# Altium PCB HP48GX.PcbDoc
Units mm, origin at the board's own origin, x right, y up, seen from the top; angles counter-clockwise.
Board outline 31 x 31 mm, 2 copper layers (L1 Top Layer, L2 Bottom Layer), stack 0.35 mm thick; 26 components, 26 nets, 106 pads, 49 vias.
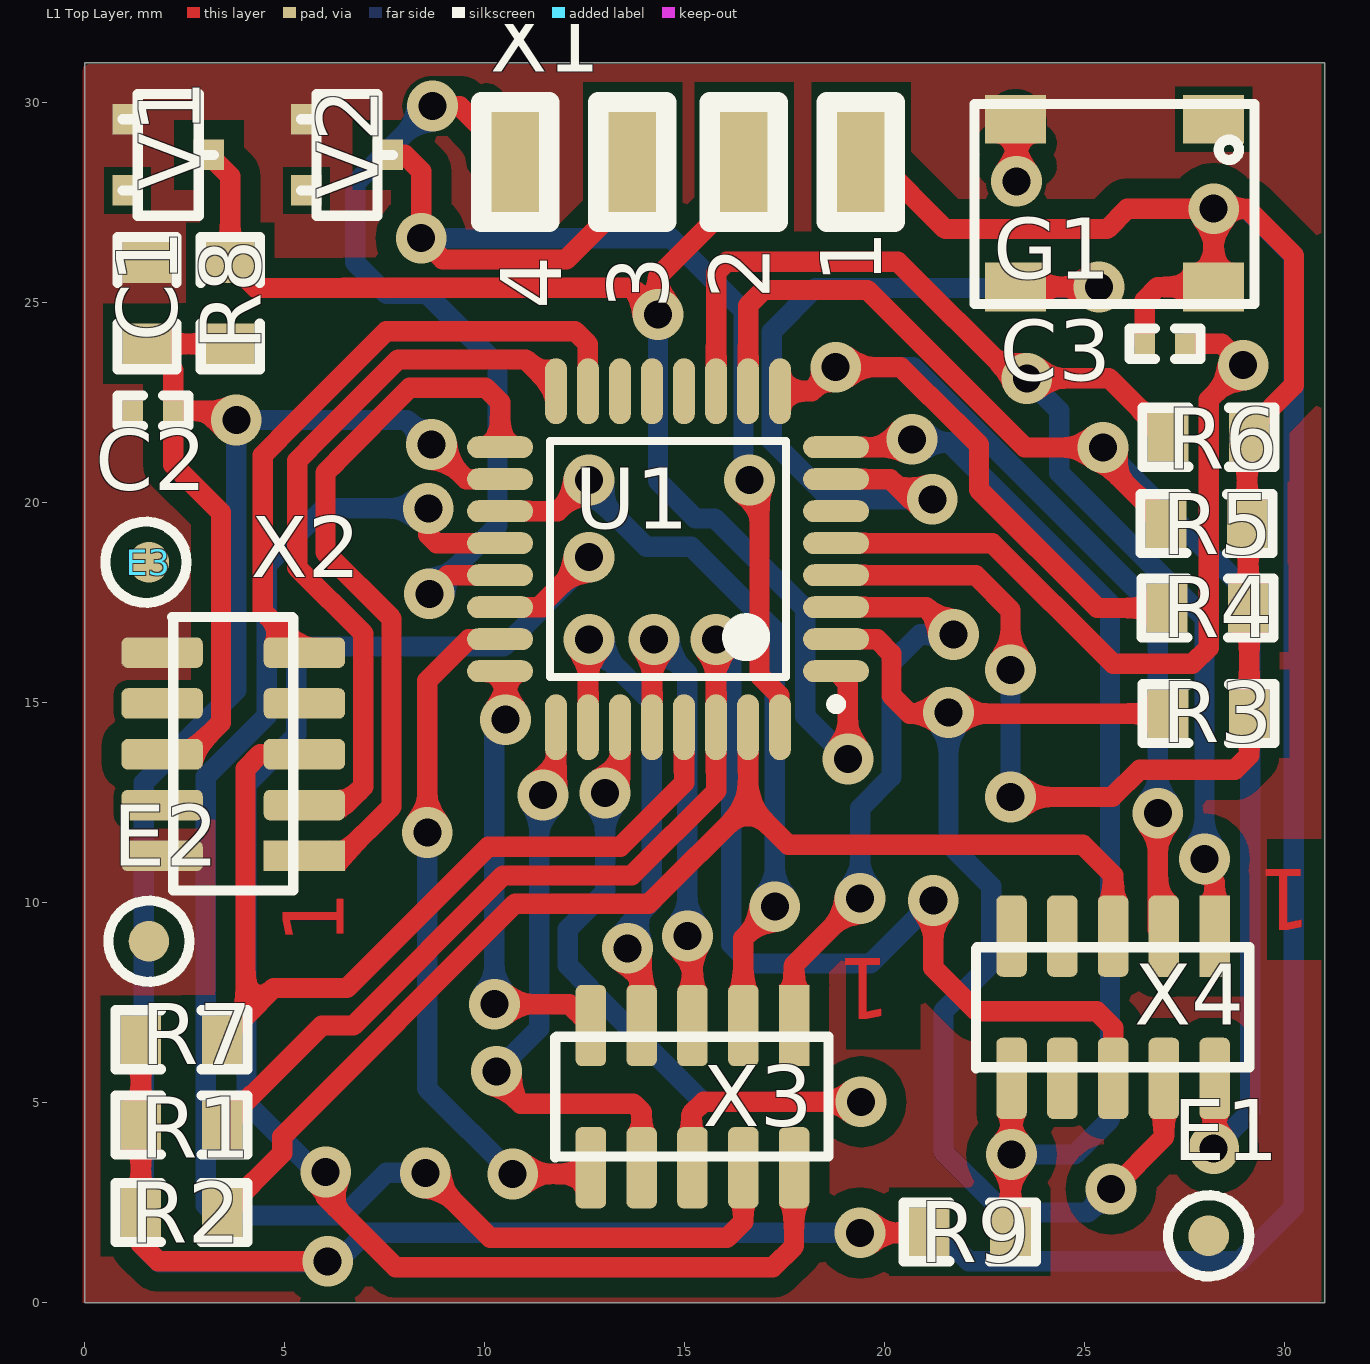
[diagram p0: L1 Top Layer view]
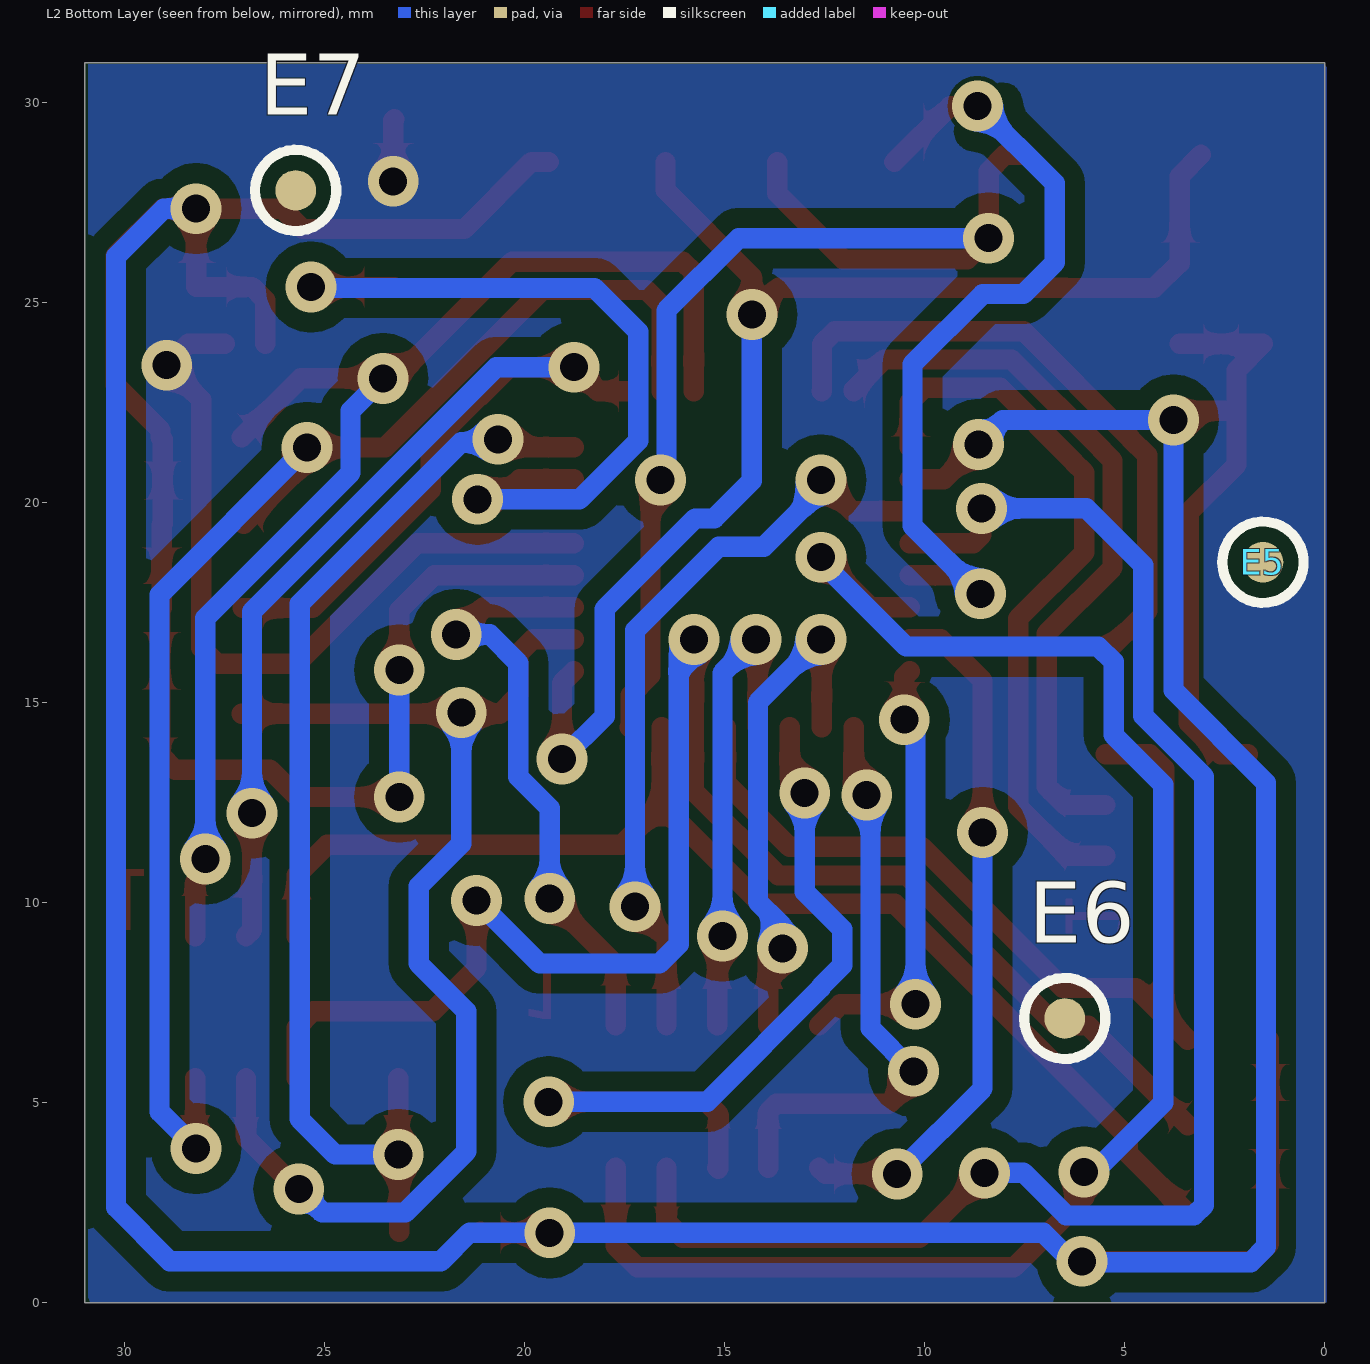
[diagram p1: L2 Bottom Layer view, seen from below]
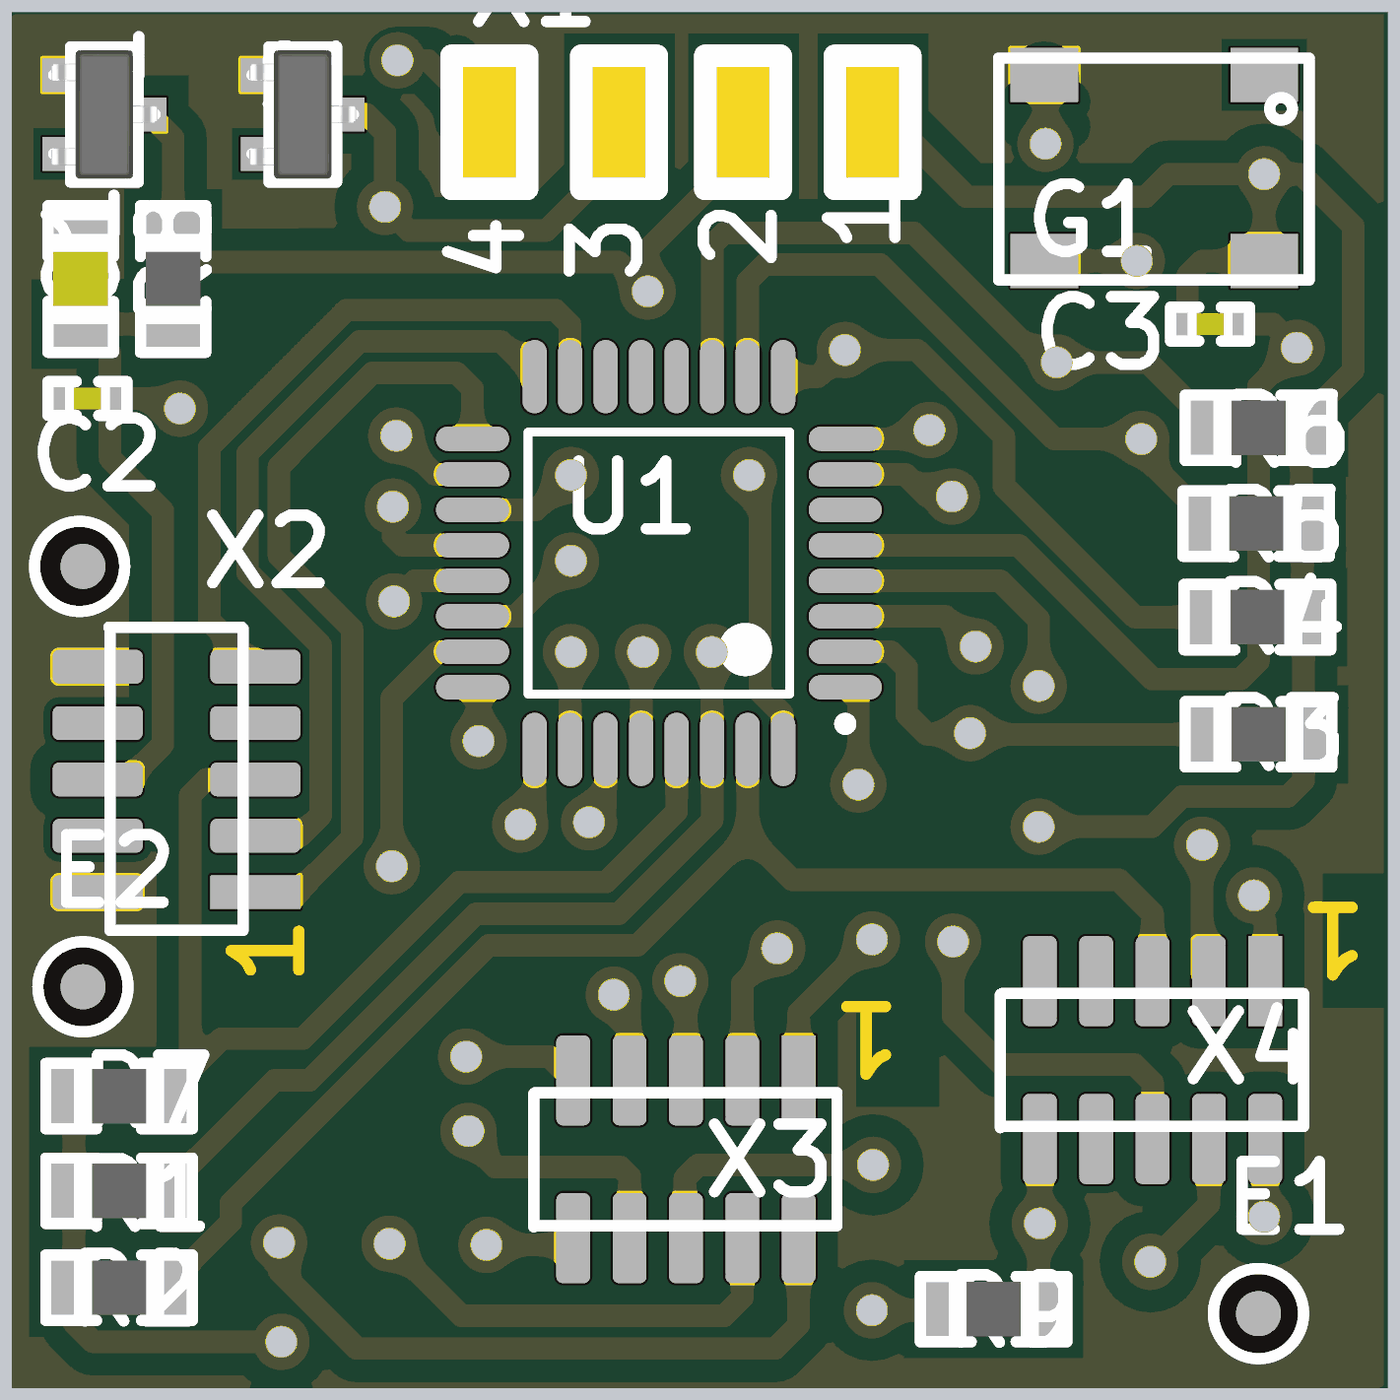
[diagram p2: 3D render of the assembled board from above, using the file's embedded part models]

## Layer stack, top to bottom
Top Solder: solder mask 0.02, Solder Resist, Dk 3.6
L1 Top Layer: signal copper 0.048
Prepreg: core 0.254, FR4, Tg150, Dk 4.2
L2 Bottom Layer: signal copper 0.048
Bottom Solder: solder mask 0.02, Solder Resist, Dk 3.6

## Board outline
0,0 0,31 31,31 31,0

## Design rules (kind name [scope] priority, off if disabled: settings)
AssemblyTestPointUsage [All] p1 off:
AssemblyTestpoint [All] p1: testpointundercomponent=TRUE minsize=1.016 maxsize=2.54 preferedsize=1.016 minholesize=0 maxholesize=5.08 preferedholesize=0 testpointgrid=0.025 usegrid=FALSE gridtolerance=0 allowsidebottom=TRUE minspacing=2.54
Clearance "Clearance_NPTH hole" [OnLayer('MultiLayer') and (PadIsPlated = 'False')] p1: gap=0.2
Clearance Clearance_NoNet [((Not InAnyNet) And IsPad)] p2: gap=0.2
Clearance "Clearance_Poly to Board Outline" [InPolygon vs OnLayer('KeepOutLayer')] p3: gap=0.508
Clearance "Clearance_Poly to DiffPair" [(InDifferentialPairClass('All Differential Pairs')) vs InPolygon] p4: gap=2.032
Clearance "Clearance_Poly to All" [InPolygon] p5: gap=0.5
Clearance [All] p6: gap=0.2
ComponentClearance [All] p1 off: gap=0.254 collisioncheckmode=3 verticalgap=0.254 showdistances=FALSE
DiffPairsRouting DiffPairsRouting_90R [InDifferentialPairClass('USB')] p1: maxlimit=0.203 minlimit=0.203 mostfreqgap=0.203 toplayer_minwidth=0.203 toplayer_maxwidth=0.406 toplayer_prefwidth=0.406 bottomlayer_minwidth=0.203 bottomlayer_maxwidth=0.406 bottomlayer_prefwidth=0.406 maxuncoupledlength=22.86
DiffPairsRouting DiffPairsRouting_100R [InDifferentialPairClass('Ethernet')] p2: maxlimit=0.254 minlimit=0.254 mostfreqgap=0.254 toplayer_minwidth=0.203 toplayer_maxwidth=0.356 toplayer_prefwidth=0.356 bottomlayer_minwidth=0.203 bottomlayer_maxwidth=0.356 bottomlayer_prefwidth=0.356 maxuncoupledlength=22.86
FabricationTestPointUsage TestPointUsage [All] p1 off: valid=0 allowmultiple=FALSE
FabricationTestpoint Testpoint [All] p1 off: side=3 testpointundercomponent=TRUE minsize=1.016 maxsize=2.54 preferedsize=1.524 minholesize=0.508 maxholesize=1.016 preferedholesize=0.813 testpointgrid=0.025 allowsidetop=TRUE allowsidebottom=TRUE usegrid=TRUE gridtolerance=0
HoleSize [All] p1: absolutevalues=TRUE maxlimit=4.724 minlimit=0.203 maxpercent=80.000 minpercent=20.000
HoleToHoleClearance [All] p1: gap=0.254 allowstackedmicrovias=FALSE
MatchedLengths "MatchedLengths PAN1.1 RX" [inDifferentialPair('PAN1.1_RX')] p1 off: tolerance=0.15 checknetsindiffpair=TRUE checkdiffpairvsdiffpair=FALSE checkxsignals=FALSE checkothers=FALSE
MatchedLengths "MatchedLengths PAN1.1 TX" [inDifferentialPair('PAN1.1_TX')] p2 off: tolerance=0.15 checknetsindiffpair=TRUE checkdiffpairvsdiffpair=FALSE checkxsignals=FALSE checkothers=FALSE
MatchedLengths "MatchedLengths PAN1.2 RX" [inDifferentialPair('PAN1.2_RX')] p3 off: tolerance=0.15 checknetsindiffpair=TRUE checkdiffpairvsdiffpair=FALSE checkxsignals=FALSE checkothers=FALSE
MatchedLengths "MatchedLengths PAN1.2 TX" [inDifferentialPair('PAN1.2_TX')] p4 off: tolerance=0.15 checknetsindiffpair=TRUE checkdiffpairvsdiffpair=FALSE checkxsignals=FALSE checkothers=FALSE
MatchedLengths "MatchedLengths LAN2 RX" [inDifferentialPair('LAN2_RX')] p5 off: tolerance=0.15 checknetsindiffpair=TRUE checkdiffpairvsdiffpair=FALSE checkxsignals=FALSE checkothers=FALSE
MatchedLengths "MatchedLengths LAN2 TX" [inDifferentialPair('LAN2_TX')] p6 off: tolerance=0.15 checknetsindiffpair=TRUE checkdiffpairvsdiffpair=FALSE checkxsignals=FALSE checkothers=FALSE
MatchedLengths "MatchedLengths USB" [inDifferentialPair('USB1_D')] p7 off: tolerance=0.15 checknetsindiffpair=TRUE checkdiffpairvsdiffpair=FALSE checkxsignals=FALSE checkothers=FALSE
MinimumAnnularRing [All] p1: minimumring=0.2
MinimumSolderMaskSliver [All] p1: minsoldermaskwidth=0.1
PlaneClearance [All] p1 off: clearance=0.406
PlaneConnect [All] p1 off: planeconnectstyle=Relief reliefexpansion=0.406 reliefentries=4 reliefconductorwidth=0.305 reliefairgap=0.508
PolygonConnect "PolygonConnect Direct" [All] p1: connectstyle=Direct reliefconductorwidth=0.254 reliefentries=4 polygonreliefangle="90 Angle" airgapwidth=0.254
RoutingCorners [All] p1 off: cornerstyle=45-Degree minsetback=2.54 maxsetback=2.54
RoutingLayers [All] p1 off: top layer_v5=TRUE bottom layer_v5=TRUE
RoutingPriority [All] p1 off: routingpriority=0
RoutingVias "Routing Vias" [All] p1: holewidth=0.254 width=0.61 viastyle="Through Hole" minholewidth=0.2 minwidth=0.457 maxholewidth=0.813 maxwidth=1.422
SilkToSolderMaskClearance SilkscreenOverComponentPads [IsPad] p1: minsilkscreentomaskgap=0.254 clearancetoexposedcopper=TRUE
SolderMaskExpansion "SolderMaskExpansion_NPTH Hole" [OnLayer('MultiLayer') and (PadIsPlated = 'False')] p1: expansion=0.102 soldermaskfromhole=TRUE
SolderMaskExpansion "SolderMaskExpansion Via 6/18" [((ObjectKind = 'Via') and (Holesize = (6)) and (ViaDiameter = (18)))] p2 off: expansion=-0.051
SolderMaskExpansion "SolderMaskExpansion Via 8/22" [((ObjectKind = 'Via') and (Holesize = (8)) and (ViaDiameter = (22)))] p3 off: expansion=-0.051
SolderMaskExpansion "SolderMaskExpansion Via 10/24" [((ObjectKind = 'Via') and (Holesize = (10)) and (ViaDiameter = (24)))] p4 off: expansion=-0.127
SolderMaskExpansion "SolderMaskExpansion Via 12/26" [((ObjectKind = 'Via') and (Holesize = (12)) and (ViaDiameter = (26)))] p5 off: expansion=-0.178
SolderMaskExpansion "SolderMaskExpansion Via 16/32" [((ObjectKind = 'Via') and (Holesize = (16)) and (ViaDiameter = (32)))] p6 off: expansion=-0.203
SolderMaskExpansion "SolderMaskExpansion Via 32/56" [((ObjectKind = 'Via') and (Holesize = (32)) and (ViaDiameter = (56)))] p7 off: expansion=-0.178
SolderMaskExpansion "SolderMaskExpansion Board" [All] p8: expansion=0.051
ViasUnderSMD [All] p1 off: allowed=FALSE
Width Width_90R [InDifferentialPairClass('USB')] p1: maxlimit=0.406 minlimit=0.406 preferedwidth=0.406
Width Width_100R [InDifferentialPairClass('Ethernet')] p2: maxlimit=0.356 minlimit=0.356 preferedwidth=0.356
Width "Width Track" [All] p3: maxlimit=0.508 minlimit=0.2 preferedwidth=0.305 minimp=50.000000 maximp=50.000000 favimp=50.000000
15 further rules are at their usual default settings.

## Classes and differential pairs
differential pair class USB: USB1_D
differential pair class Ethernet: L2_RX L2_TX LAN2_RX LAN2_TX P1.1_RX P1.1_TX PAN1.1_RX PAN1.1_TX PAN1.2_RX PAN1.2_TX

## Components (designator, comment, footprint, x,y, rotation, side; value= is the part's Value field where it differs from the comment)
C1 "1pF" 0805C 1.549,24.994 r90 top
C2 "100nF" 0402C 2.21,22.301 r180 top
C3 "100nF" 0402C 26.492,23.978 r0 top
E1 "Fiducial" "ZENTRIER Fiducial"#1 28.092,1.676 r0 top
E2 "Fiducial" "ZENTRIER Fiducial"#1 1.6,9.042 r0 top
E3 "Fiducial" "ZENTRIER Fiducial"#2 1.524,18.517 r0 top
E5 "Fiducial" "ZENTRIER Fiducial"#1 1.549,18.517 r180 bottom
E6 "Fiducial" "ZENTRIER Fiducial"#1 6.502,7.112 r180 bottom
E7 "Fiducial" "ZENTRIER Fiducial"#1 25.73,27.813 r180 bottom
G1 "CFPS-72 12MHz" TW0203A 29.235,29.972 r180 top
R1 "10K" 0805R 2.413,4.445 r180 top
R2 "10K" 0805R 2.413,2.261 r180 top
R3 "10K" 0805R 28.092,14.732 r0 top
R4 "10K" 0805R 28.067,17.374 r0 top
R5 "10K" 0805R 28.042,19.482 r0 top
R6 "10K" 0805R 28.092,21.641 r0 top
R7 "10K" 0805R 2.413,6.579 r180 top
R8 "2k" 0805R 3.632,24.994 r270 top
R9 "10k" 0805R 22.123,1.778 r180 top
U1 "ATtiny88" 32A_N 14.58,18.593 r180 top
V1 "MMBZ5227B 8B" SOT-23 2.083,28.702 r270 top
V2 "MMBZ5227B 8B" SOT-23 6.553,28.702 r270 top
X1 "LÖTANSCHLUSS 4-FACH" "LÖTANSCHLUSS 4X 2X5MM" 13.818,26.746 r90 top
X2 "Header 10P" "XHEAD2R10PR1.27MMSB SMD" 3.734,13.716 r90 top
X3 "Header 10P" "XHEAD2R10PR1.27MMSB SMD" 15.189,5.182 r180 top
X4 "Header 10P" "XHEAD2R10PR1.27MMSB SMD" 25.705,7.417 r180 top

## Footprints (in the part's own frame and the unit in brackets; to place one, negate y for a bottom-side part, rotate by r counter-clockwise, add the part's x,y. Pads: shape width x height; smd on the part's side, far side on the other; paste and mask are expansions set on the pad)
32A_N [mm] "Thin QFP, 32-Leads, Body 7x7mm, Pitch 0.8mm, IPC Medium Density"
  oval 1.65x0.55 smd: 1(-4.2,2.8) 2(-4.2,2) 3(-4.2,1.2) 4(-4.2,0.4) 5(-4.2,-0.4) 6(-4.2,-1.2) 7(-4.2,-2) 8(-4.2,-2.8) 17(4.2,-2.8) 18(4.2,-2) 19(4.2,-1.2) 20(4.2,-0.4) 21(4.2,0.4) 22(4.2,1.2) 23(4.2,2) 24(4.2,2.8)
  oval 0.55x1.65 smd: 9(-2.8,-4.2) 10(-2,-4.2) 11(-1.2,-4.2) 12(-0.4,-4.2) 13(0.4,-4.2) 14(1.2,-4.2) 15(2,-4.2) 16(2.8,-4.2) 25(2.8,4.2) 26(2,4.2) 27(1.2,4.2) 28(0.4,4.2) 29(-0.4,4.2) 30(-1.2,4.2) 31(-2,4.2) 32(-2.8,4.2)
  silkscreen extent -4.33,-2.95 2.95,3.75, body extent -3.5,-3.5 3.5,3.5, height 1.2
0402C [mil]
  rect 20x20 smd: 1(0,0) 2(40,0)
  silkscreen extent -15,-15 55,15, body extent 0,-10 40,10, height 22
0805C [mil]
  rect 40x48 smd: 1(-40,0) 2(40,0)
  silkscreen extent -65,-29 65,29, body extent -40,-25 40,25, height 50
0805R [mil]
  rect 40x48 smd: 1(-40,0) 2(40,0)
  silkscreen extent -65,-29 65,29, body extent -40,-25 40,25, height 20
"LÖTANSCHLUSS 4X 2X5MM" [mm]
  rect 3x1.5 smd paste-1.27: 1(1.778,-5.588) 2(1.778,-2.667) 3(1.778,0.127) 4(1.778,3.048)
  silkscreen extent 0.28,-6.43 3.28,3.91
SOT-23 [mil]
  rect 30x30 smd: 1(-35,-40) 2(35,-40) 3(0,40)
  silkscreen extent -60,-45 60,45, body extent -57,-47 57,47, height 39
TW0203A [mil]
  rect 60x48 smd: 1(40,15) 2(235,15) 3(235,180) 4(40,180)
  silkscreen extent 0,0 276,197
"XHEAD2R10PR1.27MMSB SMD" [mil]
  rect 30x80 smd: 1(-100,-69)
  rrect40% 30x80 smd: 2(-100,71) 3(-50,-69) 4(-50,71) 5(0,-69) 6(0,71) 7(50,-69) 8(50,71) 9(100,-69) 10(100,71)
  silkscreen extent -134,-58 135,61
"ZENTRIER Fiducial"#1 [mil]
  round 40 smd paste+0 mask+20: 1(0,0)
  L1 Top Layer pour cut-out: 0,40 15.31,36.96 28.28,28.28 36.96,15.31 40,0 40,0 36.96,-15.31 28.28,-28.28 15.31,-36.96 0,-40 0,-40 -15.31,-36.96 -28.28,-28.28 -36.96,-15.31 -40,0 -40,0 -36.96,15.31 -28.28,28.28 -15.31,36.96 0,40
  silkscreen extent -40,-40 40,40
"ZENTRIER Fiducial"#2 [mil]
  round 40 smd paste+0 mask+20: 1(2.99,0)
  L1 Top Layer pour cut-out: 0,40 15.31,36.96 28.28,28.28 36.96,15.31 40,0 40,0 36.96,-15.31 28.28,-28.28 15.31,-36.96 0,-40 0,-40 -15.31,-36.96 -28.28,-28.28 -36.96,-15.31 -40,0 -40,0 -36.96,15.31 -28.28,28.28 -15.31,36.96 0,40
  silkscreen extent -40,-40 40,40

## Part data
C1: library part "(1pF  0805  15.00064", "Kond/Chip-Kondensator"
C2 C3: library part "1uF  0402  118194", "Kond/Chip-Kondensator"
E1 E2 E3 E5 E6 E7: library part "ZENTRIERMARKE Fiducial", "Zubehör/Zentriermarke, 2...8x diagonal auf jedem Print"
G1: library part "OSZI: 8MHz TW0203  TW0203A  117861", "RF/OSZI"
R1 R2 R3 R4 R5 R6 R7 R8 R9: library part "(1K  0805  14.00130", "Wid/Chip-Widerstand"
U1: library part ATtiny88-AU, "8-bit AVR Microcontroller, 1.8-5.5V, 8KB Flash, 64 Bytes EEPROM, 512 Bytes SRAM, 32-pin TQFP, Industrial Grade (-40°C to 85°C), Pb-Free"
V1 V2: library part "MMBZ5227B 8B  SOT-23  10.00022", "Semidisc/Zener-Diode"
X1: library part "LÖTANSCHLUSS 4-FACH  LÖTANSCHLUSS 4X 2X5MM  -", "Stecker/Lötanschluss"
X2 X3 X4: library part "HEADER10P  XHEAD2R20PR0.5SB  119896", "Stecker/Headerf Stehend"

## Via types
v1: diameter 1.27, hole 0.7, L1 Top Layer to L2 Bottom Layer, tented bottom, 49 vias

## Nets (pads, with @x,y where several pads share a name; then routed paths per layer and width w, separated by ;. In a path a pad name is that pad's centre, name@x,y a point inside that pad or via, vN(x,y) a via of type N, cw(c..) or ccw(c..) an arc to the next point about the centre after c; other vN are vias at no path point)
+5V: C1.1 C2.1 C3.1 G1.4 R1.2 R2.2 R3.2 R4.2 R5.2 R6.2 R7.2 R8.2 R9.2 U1.4 U1.18 X1.1 X2.6 | length 158.6
  L1 Top Layer w0.508: R7.2 R1.2 R2.2 1.397,1.473 1.829,1.041 v1(6.071,1.041) ; X2.6 2.61,13.716 3.4,14.506 3.4,19.764 2.21,20.955 C2.1 ; R8.2 C1.1 2.21,23.317 C2.1 ; v1(3.785,22.073) 3.556,22.301 C2.1 ; v1(8.661,21.463) 9.532,20.593 U1.18 U1.18@10.359,20.572 ; U1.4 22.269,18.193 23.139,17.323 v1(23.139,15.824) ; v1(19.38,1.753) 21.082,1.753 R9.2 ; X1.1 19.837,28.524 21.514,26.848 25.552,26.848 26.06,27.356 v1(28.219,27.356) ; v1(23.139,12.649) 25.689,12.649 26.371,13.332 28.75,13.332 29.108,13.691 R3.2 29.108,17.348 R4.2 29.083,19.456 R5.2 29.058,21.59 R6.2 29.108,21.819 30.226,22.936 30.226,26.187 29.058,27.356 v1(28.219,27.356) ; C3.1 26.492,25.07 26.822,25.4 G1.4 v1(28.219,27.356)
  L2 Bottom Layer w0.508: v1@6.071,1.016 1.855,1.016 1.473,1.398 1.473,13.005 3.785,15.316 v1(3.785,22.073) 8.052,22.073 v1(8.661,21.463) ; v1(6.071,1.041) 6.326,1.041 7.037,1.753 v1(19.38,1.753) 21.387,1.753 22.098,1.041 28.877,1.041 30.223,2.388 30.223,26.165 29.032,27.356 v1(28.219,27.356) ; v1(23.139,12.649) v1(23.139,15.824)
A0: R6.1 U1.11 X4.1 | length 32.1
  L1 Top Layer w0.508: U1.11 15.78,25.762 16.049,26.031 20.324,26.031 23.241,23.114 v1(23.546,23.114) 25.603,23.114 R6.1 ; v1(27.991,11.1) 27.991,10.77 28.245,10.516 X4.1
  L2 Bottom Layer w0.508: v1(23.546,23.114) 24.359,22.301 24.359,20.752 27.991,17.12 v1(27.991,11.1)
A1: R5.1 U1.10 X4.2 | length 36.6
  L1 Top Layer w0.508: U1.10 16.58,24.936 16.967,25.323 19.558,25.323 23.495,21.387 v1(25.451,21.387) 25.451,21.057 R5.1 ; v1(28.219,3.861) 28.245,3.886 X4.2
  L2 Bottom Layer w0.508: v1(25.451,21.387) 29.134,17.704 29.134,4.775 v1(28.219,3.861)
A2: R4.1 U1.9 X4.3 | length 31.8
  L1 Top Layer w0.508: U1.9 18.17,22.793 v1(18.771,23.393) 20.393,23.393 21.107,22.679 21.127,22.679 22.352,21.454 22.352,20.331 25.309,17.374 R4.1 ; v1(26.822,12.243) 26.822,9.322 X4.3
  L2 Bottom Layer w0.508: v1(18.771,23.393) 20.716,23.393 26.822,17.287 v1(26.822,12.243)
A3: R3.1 U1.2 X4.4 | length 30
  L1 Top Layer w0.508: U1.2 19.805,16.593 20.164,16.235 20.164,15.189 20.621,14.732 R3.1 ; v1(25.654,2.845) 25.679,2.845 26.975,4.14 X4.4
  L2 Bottom Layer w0.508: v1(21.59,14.757) 21.59,11.481 22.657,10.414 22.657,8.484 21.463,7.29 21.463,3.785 22.987,2.261 25.07,2.261 v1(25.654,2.845)
A4: R2.1 U1.31 X4.5 | length 30.9
  L1 Top Layer w0.508: R2.1@3.454,2.261 4.931,3.737 4.931,4.158 10.752,9.979 14.1,9.979 16.58,12.458 ; U1.31 16.58,12.458 ; X4.5 25.705,10.693 24.943,11.455 17.583,11.455 16.58,12.458
A5: R1.1 U1.30 X4.6 | length 41.3
  L1 Top Layer w0.508: R1.1 5.918,6.934 6.706,6.934 10.458,10.687 13.669,10.687 15.78,12.797 U1.30 ; U1.30@15.773,14.399 v1(15.773,16.586) ; v1(21.209,10.06) 21.209,8.382 22.301,7.29 25.298,7.29 25.705,6.883 X4.6
  L2 Bottom Layer w0.508: v1(15.773,16.586) 16.158,16.202 16.158,8.963 16.637,8.484 19.632,8.484 v1(21.209,10.06)
A9: U1.22 X3.2 | length 40.7
  L1 Top Layer w0.508: v1(6.02,3.277) 6.02,2.642 7.772,0.889 17.196,0.889 17.729,1.422 X3.2 ; U1.22 11.449,17.393 11.449,17.494 v1(12.598,18.644)
  L2 Bottom Layer w0.508: v1(6.02,3.277) 5.766,3.277 4.039,5.004 4.039,12.954 5.281,14.197 5.281,16.026 5.664,16.408 10.465,16.408 12.598,18.542 v1(12.598,18.644)
A10: U1.19 X3.3 | length 19.1
  L1 Top Layer w0.508: U1.19 11.817,19.793 v1(12.598,20.574) ; X3.3 16.459,9.119 v1(17.247,9.906)
  L2 Bottom Layer w0.508: v1(12.598,20.574) 12.598,20.333 14.027,18.904 15.157,18.904 17.247,16.815 v1(17.247,9.906)
A11: U1.20 X3.4 | length 40
  L1 Top Layer w0.508: v1(8.509,3.251) 10.135,1.626 16.053,1.626 16.459,2.032 X3.4 ; v1(8.585,19.863) 8.585,19.202 8.795,18.993 U1.20
  L2 Bottom Layer w0.508: v1(8.509,3.251) 7.534,3.251 6.471,2.188 3.273,2.188 3.023,2.438 3.023,13.157 4.545,14.68 4.545,18.439 5.969,19.863 v1(8.585,19.863)
A12: U1.28 X3.5 | length 12.3
  L1 Top Layer w0.508: U1.28 14.18,16.542 v1(14.224,16.586) ; v1(15.062,9.169) 15.189,9.042 X3.5
  L2 Bottom Layer w0.508: v1(14.224,16.586) 15.062,15.748 v1(15.062,9.169)
A13: U1.27 X3.6 | length 21
  L1 Top Layer w0.508: v1(13.005,12.751) 13.38,13.126 U1.27 ; X3.6 15.164,3.353 15.164,4.724 15.469,5.029 v1(19.406,5.029)
  L2 Bottom Layer w0.508: v1(13.005,12.751) 13.005,10.278 12.068,9.341 12.068,8.439 12.598,7.909 12.598,7.874 15.392,5.08 ; 15.443,5.029 v1(19.406,5.029)
A14: U1.26 X3.7 | length 12.9
  L1 Top Layer w0.508: U1.26 12.58,16.567 v1(12.598,16.586) ; v1(13.564,8.865) 13.919,8.509 X3.7
  L2 Bottom Layer w0.508: v1(12.598,16.586) 14.173,15.011 14.173,10.033 13.564,9.423 v1(13.564,8.865)
A15: U1.25 X3.8 | length 14.8
  L1 Top Layer w0.508: v1(10.287,5.791) 10.287,5.588 10.897,4.978 13.716,4.978 13.919,4.775 X3.8 ; v1(11.455,12.7) 11.78,13.024 U1.25
  L2 Bottom Layer w0.508: v1(10.287,5.791) 11.36,6.864 11.36,12.605 v1(11.455,12.7)
A16: U1.24 X3.9 | length 11.1
  L1 Top Layer w0.508: v1(10.236,7.468) 12.116,7.468 X3.9 ; U1.24 10.516,15.657 v1(10.516,14.58)
  L2 Bottom Layer w0.508: v1(10.236,7.468) 10.236,14.3 v1(10.516,14.58)
A17: U1.23 X3.10 | length 17.5
  L1 Top Layer w0.508: v1(8.56,11.76) 8.56,15.554 9.599,16.593 U1.23 ; v1(10.693,3.226) 12.497,3.226 X3.10
  L2 Bottom Layer w0.508: v1(8.56,11.76) 8.56,5.359 v1(10.693,3.226)
CLKIN: G1.3 U1.7 | length 20.7
  L1 Top Layer w0.508: U1.7 20.133,20.593 20.634,20.091 v1(21.184,20.091) ; G1.3@23.241,25.375 G1.3 v1(25.349,25.4)
  L2 Bottom Layer w0.508: v1(21.184,20.091) 18.634,20.091 17.17,21.555 17.17,24.282 18.263,25.375 25.324,25.375 v1(25.349,25.4)
D+: U1.32 V2.3 X1.3 | length 29.3
  L1 Top Layer w0.508: V2.3 8.001,28.702 8.407,28.296 v1(8.407,26.619) 8.941,26.086 12.04,26.086 13.691,27.737 X1.3 ; v1(16.612,20.574) 16.862,20.323 16.862,15.691 17.359,15.195 17.359,14.414 U1.32
  L2 Bottom Layer w0.508: v1@8.331,26.619 v1(8.407,26.619) 14.656,26.619 16.462,24.813 16.462,20.723 v1(16.612,20.574)
D-: R8.1 U1.1 V1.3 X1.2 | length 34.6
  L1 Top Layer w0.508: V1.3 3.632,28.169 R8.1 ; R8.1@3.632,25.984 R8.1 ; X1.2 16.485,27.813 14.326,25.654 v1(14.326,24.714) 13.662,25.378 6.474,25.378 6.471,25.375 4.267,25.375 R8.1 ; U1.1 19.075,15.498 v1(19.075,13.601)
  L2 Bottom Layer w0.508: v1(14.326,24.714) 14.326,20.549 15.262,19.612 15.745,19.612 18.007,17.35 18.007,14.668 v1(19.075,13.601)
GND: C1.2 C2.2 C3.2 G1.2 U1.5 U1.21 V1.1 V2.1 X1.4 X2.2 X2.10 | length 41.8
  L1 Top Layer w0.508: v1(8.611,17.729) 9.074,18.193 U1.21 ; v1(8.687,29.921) 9.373,29.921 X1.4 ; U1.5 22.689,18.993 25.705,15.977 27.686,15.977 28.092,16.383 28.092,22.581 v1(28.956,23.444) 28.423,23.978 C3.2 ; v1@23.266,28.067 v1(23.292,28.042) 23.292,29.566 G1.2
  L2 Bottom Layer w0.508: v1(8.611,17.729) 10.312,19.431 10.312,23.47 8.56,25.222 7.544,25.222 6.756,26.01 6.756,27.991 v1(8.687,29.921)
MISO: U1.16 X2.3 | length 18.6
  L1 Top Layer w0.508: X2.3 6.496,12.446 6.956,12.906 6.956,16.736 5.309,18.384 5.309,21.055 5.582,21.328 5.582,21.34 7.826,23.585 ; 8.026,23.585 7.826,23.585 ; U1.16 11.78,22.829 11.024,23.585 7.826,23.585
MOSI: U1.15 X2.9 | length 16.1
  L1 Top Layer w0.508: X2.9 4.445,17.297 4.445,21.193 4.874,21.622 4.874,21.634 7.533,24.293 12.253,24.293 12.573,23.974 12.573,22.799 U1.15
ONKEY: R9.1 U1.8 X4.10 | length 28.2
  L1 Top Layer w0.508: U1.8 20.478,21.393 v1(20.676,21.59) ; R9.1 23.139,3.683 v1(23.165,3.708) X4.10
  L2 Bottom Layer w0.508: v1(20.676,21.59) 20.752,21.514 21.594,21.514 25.629,17.479 25.629,4.597 24.74,3.708 v1(23.165,3.708)
RESET: R7.1 U1.29 X2.5 | length 23.4
  L1 Top Layer w0.508: R7.1 4.016,7.166 ; X2.5 4.375,13.716 4.016,13.357 4.016,7.166 ; U1.29 14.98,12.998 13.386,11.405 10.084,11.405 6.553,7.874 4.724,7.874 4.016,7.166
SCK: U1.17 X2.1 | length 18.2
  L1 Top Layer w0.508: X2.1 6.436,11.176 7.664,12.405 7.664,17.111 6.017,18.759 6.017,20.762 6.29,21.035 6.29,21.047 8.12,22.877 10.016,22.877 10.38,22.513 U1.17
VBAT: U1.3 X3.1 | length 15.1
  L1 Top Layer w0.508: X3.1 17.729,8.458 v1(19.38,10.109) ; U1.3 21.037,17.393 v1(21.717,16.713)
  L2 Bottom Layer w0.508: v1(19.38,10.109) 19.38,12.366 20.164,13.15 20.164,15.998 20.879,16.713 v1(21.717,16.713)
pads on no net: E1.1 E2.1 E3.1 E5.1 E6.1 E7.1 G1.1 U1.6 U1.12 U1.13 U1.14 V1.2 V2.2 X2.4 X2.7 X2.8 X4.7 X4.8 X4.9

## Polygon pours and split planes (outlines as drawn)
GND on L2 Bottom Layer "L2 Bottom Layer-No Net 1" (solid, pour order 2): -0.025,30.912 -0.051,30.886 -0.051,0.018 30.93,0.018 30.988,0.076 30.912,0.152 30.912,30.963 0.025,30.963 -0.025,30.912
GND on L1 Top Layer "L2 Bottom Layer-No Net" (solid, pour order 0): -0.025,30.912 -0.051,30.886 -0.051,0 30.912,0 30.937,0.025 30.912,0.051 30.912,30.963 0,30.963 -0.051,30.912
no net on KeepOutLayer "KeepOutLayer-No Net" (hatched 90Degree grid 0.508 track 0.533, remove dead copper): -215.661,-256.214

## Other copper
L1 Top Layer:
  text ".PCB_Kuerzel" at 167.64,-52.324 h4.06
  text ".Layer_Name" at 167.64,-58.42 h3.05
  text "Part No. PCB" at 167.64,-63.5 h1.52
  text ".PCB" at 167.64,-67.564 h3.05
L2 Bottom Layer:
  text ".PCB_Kuerzel" at -7.62,-52.324 h4.06
  text ".Layer_Name" at -7.62,-58.42 h3.05
  text "Part No. PCB" at -7.62,-63.5 h1.52
  text ".PCB" at -7.62,-67.564 h3.05

## Silkscreen, mask and mechanical layers (free items; w line width, h text height)
Top Overlay:
  lines w0.254: 165.1,-68.58 236.22,-68.58 ; 223.52,-68.58 223.52,-60.96
  text ".VariantDescription" at 167.64,-52.324 h4.06
  text "Assembly Drawing: Top" at 167.64,-58.42 h3.05
  text "Part No. Assembly" at 167.64,-63.5 h1.52
  text "Rev" at 228.092,-63.5 h1.52
  text ".VariantName" at 167.64,-67.564 h3.05
  text ".BOMRev" at 229.108,-67.564 h3.05
  text "Part No. PCB" at 167.64,-71.12 h1.52
  text ".PCB" at 167.64,-75.184 h3.05
Bottom Overlay:
  lines w0.254: -76.2,-68.58 -5.08,-68.58 ; -63.5,-68.58 -63.5,-60.96
  text ".VariantDescription" at -7.62,-52.324 h4.06
  text "Assembly Drawing: Bottom" at -7.62,-58.42 h3.05
  text "Rev" at -68.072,-63.5 h1.52
  text "Part No. Assembly" at -7.62,-63.5 h1.52
  text ".BOMRev" at -69.088,-67.564 h3.05
  text ".VariantName" at -7.62,-67.564 h3.05
  text "Part No. PCB" at -7.62,-71.12 h1.52
  text ".PCB" at -7.62,-75.184 h3.05
TopPaste:
  text ".PCB_Kuerzel" at 167.64,-52.324 h4.06
  text ".Layer_Name" at 167.64,-58.42 h3.05
  text "(Ansicht: Rakelseite)" at 195.58,-58.42 h3.05
  text "Part No. PCB" at 167.64,-63.5 h1.52
  text ".PCB" at 167.64,-67.564 h3.05
BottomPaste:
  text ".PCB_Kuerzel" at 167.64,-52.324 h4.06
  text ".Layer_Name" at 167.64,-58.42 h3.05
  text "(Ansicht: Durchsicht)" at 200.66,-58.42 h3.05
  text "Part No. PCB" at 167.64,-63.5 h1.52
  text ".PCB" at 167.64,-67.564 h3.05
Top Solder:
  text ".PCB_Kuerzel" at 167.64,-52.324 h4.06
  text ".Layer_Name" at 167.64,-58.42 h3.05
  text "Part No. PCB" at 167.64,-63.5 h1.52
  text ".PCB" at 167.64,-67.564 h3.05
Bottom Solder:
  text ".PCB_Kuerzel" at -7.62,-52.324 h4.06
  text ".Layer_Name" at -7.62,-58.42 h3.05
  text "Part No. PCB" at -7.62,-63.5 h1.52
  text ".PCB" at -7.62,-67.564 h3.05
eff. Umriss:
  the board outline again, w0.5
DrillDrawing:
  text ".Legend" at -0.152,-10.922 h1.52
  text ".PCB_Kuerzel" at 167.64,-52.324 h4.06
  text ".Layer_Name" at 167.64,-58.42 h3.05
  text "Part No. PCB" at 167.64,-63.5 h1.52
  text ".PCB" at 167.64,-67.564 h3.05
Ritzen:
  text ".PCB_Kuerzel" at 167.64,-52.324 h4.06
  text "Scoring" at 167.64,-58.42 h3.05
  text "Part No. PCB" at 167.64,-63.5 h1.52
  text ".PCB" at 167.64,-67.564 h3.05
Lack standard Top:
  text "Coating: Top" at 167.64,-58.42 h3.05
  text "Part No. PCB" at 167.64,-71.12 h1.52
  text ".PCB" at 167.64,-75.184 h3.05
Lack standard Bottom:
  the board outline again, w0.508
  text "Coating: Bottom" at -7.62,-58.42 h3.05
  text "Part No. PCB" at -7.62,-71.12 h1.52
  text ".PCB" at -7.62,-75.184 h3.05
Coating: Top:
  lines w0.254: 165.1,-68.58 236.22,-68.58 ; 223.52,-68.58 223.52,-60.96
  text ".VariantDescription" at 167.64,-52.324 h4.06
  text "Coating: Top" at 167.64,-58.42 h3.05
  text "Part No. Assembly" at 167.64,-63.5 h1.52
  text "Rev" at 228.092,-63.5 h1.52
  text ".VariantName" at 167.64,-67.564 h3.05
  text ".BOMRev" at 229.108,-67.564 h3.05
  text "Part No. PCB" at 167.64,-71.12 h1.52
  text ".PCB" at 167.64,-75.184 h3.05
Coating: Bottom:
  lines w0.254: -76.2,-68.58 -5.08,-68.58 ; -63.5,-68.58 -63.5,-60.96
  text ".VariantDescription" at -7.62,-52.324 h4.06
  text "Coating: Bottom" at -7.62,-58.42 h3.05
  text "Rev" at -68.072,-63.5 h1.52
  text "Part No. Assembly" at -7.62,-63.5 h1.52
  text ".BOMRev" at -69.088,-67.564 h3.05
  text ".VariantName" at -7.62,-67.564 h3.05
  text "Part No. PCB" at -7.62,-71.12 h1.52
  text ".PCB" at -7.62,-75.184 h3.05
ZeichnKopf-gespiegelt:
  circle w0.254: c-107.442,-81.28 r2.286
  circle w0.254: c-107.442,-81.28 r1.27
  lines w0.254: -111.76,-76.2 -5.08,-76.2 ; -111.76,-68.58 -76.2,-68.58 ; -111.76,-60.96 -5.08,-60.96 ; -110.236,-81.28 -104.648,-81.28 ; -107.442,-84.074 -107.442,-78.486 ; -103.632,-81.28 -98.044,-81.28 ; -96.52,-86.36 -96.52,-76.2 ; -86.36,-86.36 -86.36,-76.2 ; -76.2,-86.36 -76.2,-60.96 ; -111.76,-86.36 -111.76,-45.72 -5.08,-45.72 -5.08,-86.36 -111.76,-86.36 ; -102.87,-83.566 -98.806,-82.55 -98.806,-80.01 -102.87,-78.994 -102.87,-83.566
  lines w0.457: -24.892,-80.264 -20.015,-80.264 -19.304,-82.042 -18.059,-77.419 -16.993,-80.62 -16.281,-79.197 -15.748,-80.264 -7.874,-80.264
  text ".2_Drawn_by_Date_Rev1" at -99.06,-63.5 h1.52
  text ".1_Drawn_by_Rev1" at -91.44,-63.5 h1.52
  text "Drawn by" at -78.232,-63.5 h1.52
  text ".4_Approved_Date_Rev1" at -99.06,-67.056 h1.52
  text ".3_Approved_Rev1" at -91.44,-67.056 h1.52
  text "Approved" at -78.232,-67.056 h1.52
  text ".6_Changed_Date" at -99.06,-71.12 h1.52
  text ".5_Changed" at -91.44,-71.12 h1.52
  text "Changed" at -78.232,-71.12 h1.52
  text ".8_Approved_Date" at -99.06,-74.676 h1.52
  text ".7_Approved" at -91.44,-74.676 h1.52
  text "Approved" at -78.232,-74.676 h1.52
  text "Size" at -89.154,-79.248 h1.52
  text "Scale" at -78.74,-79.248 h1.52
  text "www.comlab.ch" at -45.72,-79.248 h1.52
  text "Comlab AG" at -27.94,-79.248 h1.52
  text "+41(0)31 924 24 24" at -52.832,-82.296 h1.52
  text "Phone" at -45.72,-82.296 h1.52
  text "Ey 13" at -27.94,-82.296 h1.52
  text "A3" at -88.9,-84.074 h2.54
  text "1:1" at -79.248,-84.074 h2.54
  text "COMLAB" at -7.62,-84.328 h4.57
  text "CH-3063 Ittigen" at -27.94,-85.344 h1.52
Rahmen-gespiegelt:
  lines w0.152: -116.84,-23.495 -111.76,-23.495 ; -116.84,46.99 -111.76,46.99 ; -116.84,117.475 -111.76,117.475 ; -67.564,-93.98 -67.564,-88.9 ; -67.564,182.88 -67.564,187.96 ; -18.288,-93.98 -18.288,-88.9 ; -18.288,182.88 -18.288,187.96 ; 30.861,-93.98 30.861,-88.9 ; 30.861,182.88 30.861,187.96 ; 80.01,-93.98 80.01,-88.9 ; 80.01,182.88 80.01,187.96 ; 129.286,-93.98 129.286,-88.9 ; 129.286,182.88 129.286,187.96 ; 178.435,-93.98 178.435,-88.9 ; 178.435,182.88 178.435,187.96 ; 227.584,-93.98 227.584,-88.9 ; 227.584,182.88 227.584,187.96 ; 271.78,-23.495 276.86,-23.495 ; 271.78,46.99 276.86,46.99 ; 271.78,117.475 276.86,117.475 ; -116.84,-93.98 276.86,-93.98 276.86,187.96 -116.84,187.96 -116.84,-93.98 ; -111.76,-88.9 271.78,-88.9 271.78,182.88 -111.76,182.88 -111.76,-88.9
  lines w0.254: -111.76,-86.36 271.78,-86.36
  text "8" at -91.618,184.531 h1.78
  text "7" at -42.596,184.531 h1.78
  text "6" at 6.934,184.531 h1.78
  text "5" at 55.956,184.531 h1.78
  text "4" at 105.232,184.531 h1.78
  text "3" at 154.525,184.531 h1.78
  text "2" at 203.784,184.531 h1.78
  text "1" at 252.823,184.531 h1.78
  text "A" at -113.665,150.546 h1.78
  text "A" at 274.955,150.546 h1.78
  text "B" at -113.665,79.934 h1.78
  text "B" at 274.955,79.934 h1.78
  text "C" at 274.513,22.661 h1.78
  text "C" at -113.665,9.322 h1.78
  text "D" at -113.665,-60.782 h1.78
  text "D" at 274.955,-60.782 h1.78
  text ".Print_Date" at -99.06,-88.392 h1.52
  text ".Print_Time" at -87.884,-88.392 h1.52
  text "printed" at -78.232,-88.392 h1.52
  text "This drawing contains information that is proprietary to Comlab AG and should not be used without written permission" at 269.24,-88.392 h1.52
  text "8" at -91.618,-92.329 h1.78
  text "7" at -42.596,-92.329 h1.78
  text "6" at 6.934,-92.329 h1.78
  text "5" at 55.956,-92.329 h1.78
  text "4" at 105.232,-92.329 h1.78
  text "3" at 154.525,-92.329 h1.78
  text "2" at 203.784,-92.329 h1.78
  text "1" at 252.823,-92.329 h1.78
ZeichnKopf:
  circle w0.254: c267.462,-81.28 r2.286
  circle w0.254: c267.462,-81.28 r1.27
  lines w0.254: 165.1,-76.2 271.78,-76.2 ; 165.1,-60.96 271.78,-60.96 ; 236.22,-86.36 236.22,-60.96 ; 236.22,-68.58 271.78,-68.58 ; 246.38,-86.36 246.38,-76.2 ; 256.54,-86.36 256.54,-76.2 ; 258.064,-81.28 263.652,-81.28 ; 264.668,-81.28 270.256,-81.28 ; 267.462,-84.074 267.462,-78.486 ; 165.1,-86.36 165.1,-45.72 271.78,-45.72 271.78,-86.36 165.1,-86.36 ; 258.826,-82.55 262.89,-83.566 262.89,-78.994 258.826,-80.01 258.826,-82.55
  lines w0.457: 167.894,-80.264 175.768,-80.264 176.301,-79.197 177.013,-80.62 178.079,-77.419 179.324,-82.042 180.035,-80.264 184.912,-80.264
  text "Drawn by" at 238.252,-63.5 h1.52
  text ".1_Drawn_by_Rev1" at 251.46,-63.5 h1.52
  text ".2_Drawn_by_Date_Rev1" at 259.08,-63.5 h1.52
  text "Approved" at 238.252,-67.056 h1.52
  text ".3_Approved_Rev1" at 251.46,-67.056 h1.52
  text ".4_Approved_Date_Rev1" at 259.08,-67.056 h1.52
  text "Changed" at 238.252,-71.12 h1.52
  text ".5_Changed" at 251.46,-71.12 h1.52
  text ".6_Changed_Date" at 259.08,-71.12 h1.52
  text "Approved" at 238.252,-74.676 h1.52
  text ".7_Approved" at 251.46,-74.676 h1.52
  text ".8_Approved_Date" at 259.08,-74.676 h1.52
  text "Comlab AG" at 187.96,-79.248 h1.52
  text "www.comlab.ch" at 205.74,-79.248 h1.52
  text "Scale" at 238.76,-79.248 h1.52
  text "Size" at 249.174,-79.248 h1.52
  text "Ey 13" at 187.96,-82.296 h1.52
  text "Phone" at 205.74,-82.296 h1.52
  text "+41(0)31 924 24 24" at 212.852,-82.296 h1.52
  text "1:1" at 239.268,-84.074 h2.54
  text "A3" at 248.92,-84.074 h2.54
  text "COMLAB" at 167.64,-84.328 h4.57
  text "CH-3063 Ittigen" at 187.96,-85.344 h1.52
Rahmen:
  lines w0.152: -116.84,-23.495 -111.76,-23.495 ; -116.84,46.99 -111.76,46.99 ; -116.84,117.475 -111.76,117.475 ; -67.564,-93.98 -67.564,-88.9 ; -67.564,182.88 -67.564,187.96 ; -18.415,-93.98 -18.415,-88.9 ; -18.415,182.88 -18.415,187.96 ; 30.734,-93.98 30.734,-88.9 ; 30.734,182.88 30.734,187.96 ; 80.01,-93.98 80.01,-88.9 ; 80.01,182.88 80.01,187.96 ; 129.159,-93.98 129.159,-88.9 ; 129.159,182.88 129.159,187.96 ; 178.308,-93.98 178.308,-88.9 ; 178.308,182.88 178.308,187.96 ; 227.584,-93.98 227.584,-88.9 ; 227.584,182.88 227.584,187.96 ; 271.78,-23.495 276.86,-23.495 ; 271.78,46.99 276.86,46.99 ; 271.78,117.475 276.86,117.475 ; -116.84,-93.98 -116.84,187.96 276.86,187.96 276.86,-93.98 -116.84,-93.98 ; -111.76,-88.9 -111.76,182.88 271.78,182.88 271.78,-88.9 -111.76,-88.9
  lines w0.254: -111.76,-86.36 271.78,-86.36
  text "1" at -92.803,184.531 h1.78
  text "2" at -43.764,184.531 h1.78
  text "3" at 5.495,184.531 h1.78
  text "4" at 54.788,184.531 h1.78
  text "5" at 104.064,184.531 h1.78
  text "6" at 153.086,184.531 h1.78
  text "7" at 202.616,184.531 h1.78
  text "8" at 251.638,184.531 h1.78
  text "A" at -114.935,150.546 h1.78
  text "A" at 273.685,150.546 h1.78
  text "B" at -114.935,79.934 h1.78
  text "B" at 273.685,79.934 h1.78
  text "C" at 273.243,22.661 h1.78
  text "C" at -114.935,9.322 h1.78
  text "D" at -114.935,-60.782 h1.78
  text "D" at 273.685,-60.782 h1.78
  text "This drawing contains information that is proprietary to Comlab AG and should not be used without written permission" at -109.22,-88.392 h1.52
  text "printed" at 238.252,-88.392 h1.52
  text ".Print_Time" at 247.904,-88.392 h1.52
  text ".Print_Date" at 259.08,-88.392 h1.52
  text "1" at -92.803,-92.329 h1.78
  text "2" at -43.764,-92.329 h1.78
  text "3" at 5.495,-92.329 h1.78
  text "4" at 54.788,-92.329 h1.78
  text "5" at 104.064,-92.329 h1.78
  text "6" at 153.086,-92.329 h1.78
  text "7" at 202.616,-92.329 h1.78
  text "8" at 251.638,-92.329 h1.78
Sheet:
  lines w0.152: -116.84,-93.98 -116.84,187.96 276.86,187.96 276.86,-93.98 -116.84,-93.98

## Text inside footprints (layer, text, board x,y; h text height)
X1: Top Overlay "2" at 17.12,25.095 h1.52 r90; Top Overlay "1" at 19.914,25.476 h1.52 r90; Top Overlay "4" at 11.913,24.841 h1.52 r90; Top Overlay "3" at 14.58,24.841 h1.52 r90
X2: L1 Top Layer "1" at 6.477,8.966 h1.52 r90; Top Solder "1" at 6.477,8.966 h1.52 r90
X3: L1 Top Layer "1" at 20.142,8.611 h1.52 r180; Top Solder "1" at 20.142,8.611 h1.52 r180
X4: L1 Top Layer "1" at 30.658,10.846 h1.52 r180; Top Solder "1" at 30.658,10.846 h1.52 r180